# EAGLE board PCB (EAGLE 9.7.0)
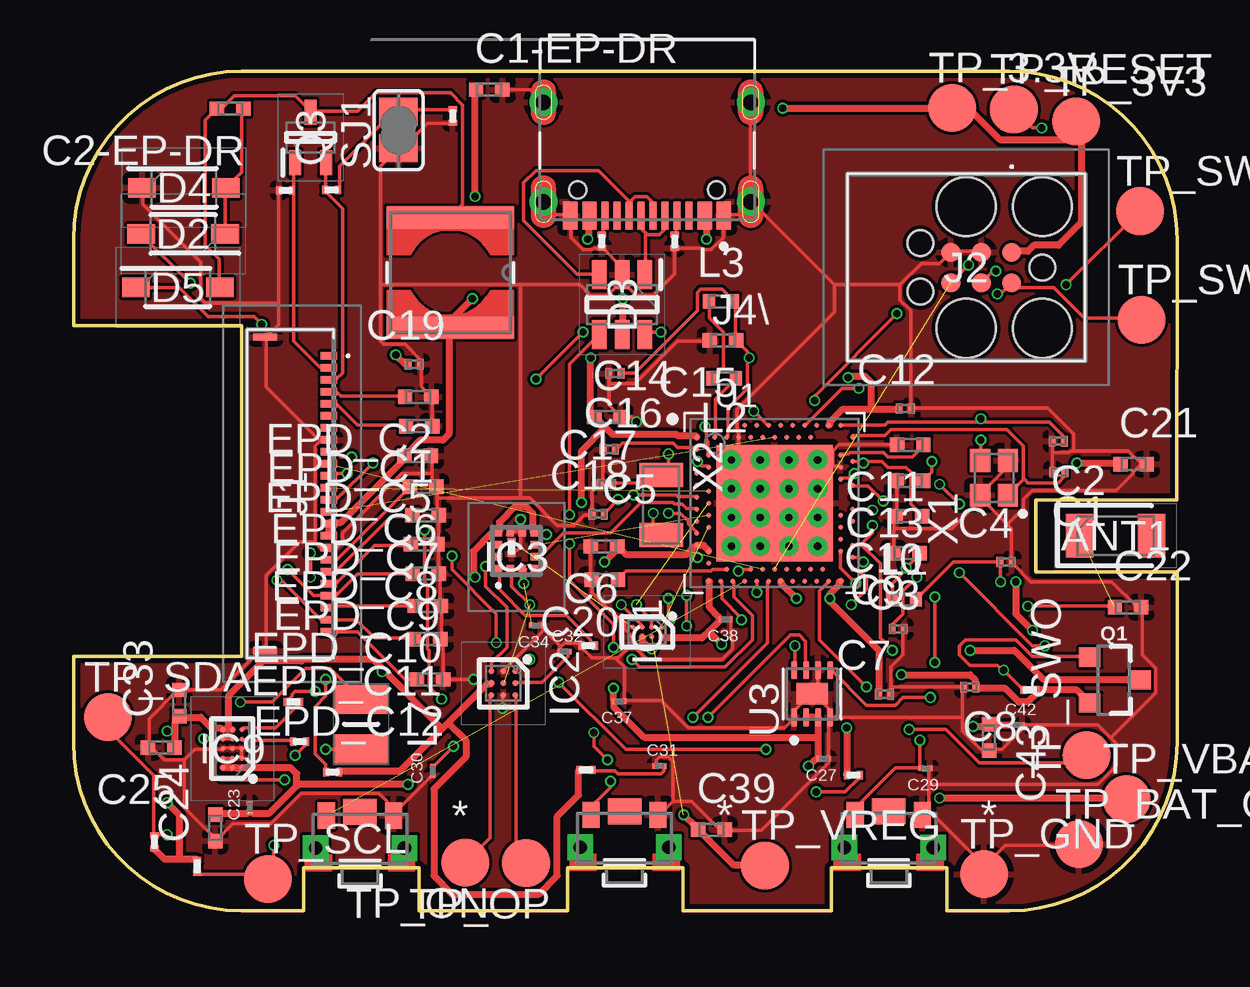
[diagram p0: board, top side]
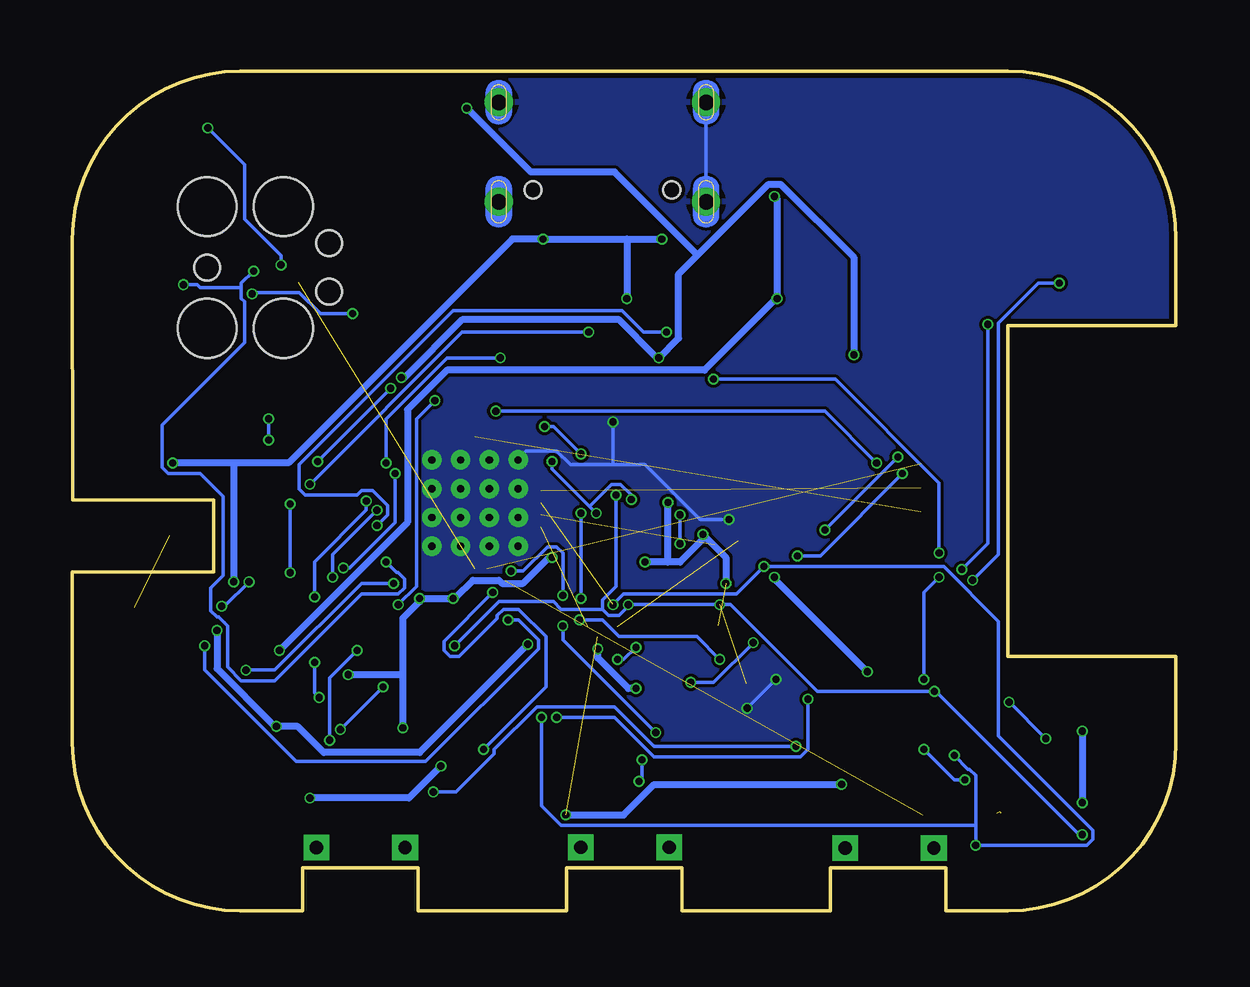
[diagram p1: board, bottom side, seen from below]

Size 46 x 35 mm. Coordinates in mm from the lower left corner, seen from the top.
Outline: 39,0 36.4,0 36.4,1.8 31.6,1.8 31.6,0 25.4,0 25.4,1.8 20.6,1.8 20.6,0 14.4,0 14.4,1.8 9.6,1.8 9.6,0 7,0 arc-90 0,7 0,10.6 7,10.6 7,24.4 0,24.4 0,28 arc-90 7,35 39,35 arc-90 46,28 45.99,17.13 40.11,17.13 40.12,14.13 46,14.13 46,7 arc-90 39,0
Copper layers (1*16): Top 0.035mm / dielectric 1.6mm / Bottom 0.035mm
Design rules "jlcpcb-2layers.dru": minimum track width 5mil, minimum drill 0.3mm, track to track 5mil, track to pad 5mil, pad to pad 5mil, via to via 5mil, smd to smd 5mil, copper to edge 0.2mm, drill to drill 6mil, minimum pad ring 10mil, minimum via ring 3mil, stop-mask expansion 4mil, vias tented up to drill 0mil, thermal gap 10mil
Net classes: 1 Power: width 0.3 mm; 2 Rest: width 0.15 mm

## Footprints (pad centres in the part's own frame; a part is rotated, then mirrored left to right if it is on the bottom)
2450AT18B100E_ANTC3216X140N = smd 1.15 x 1.8: 1 -1.5,0; 2 1.5,0
NORDIC_NRF_3_RESC0201_L = smd 0.28 x 0.43: 1 -0.255,0; 2 0.255,0
NORDIC_NRF_3_RESC0402_N = smd 0.6 x 0.6: 1 -0.55,0; 2 0.55,0
GRM011R60J152KE01L_2_CAPC0201X13N = smd 0.22 x 0.23: 1 -0.185,0; 2 0.185,0
ESP32_C6_LIBRARY_5_SOD3716X135N = smd 1.15 x 0.8: 1 -1.75,0; 2 1.75,0
ESP32_C6_LIBRARY_3_SOT95P280X145-6N = smd 1.2 x 0.6: 1 -1.25,0.95; 2 -1.25,0; 3 -1.25,-0.95; 4 1.25,-0.95; 5 1.25,0; 6 1.25,0.95
BQ25180YBGR_BGA8C40P2X4_100X155X50 = smd 0.2 x 0.2: A1 -0.2,0.6; A2 0.2,0.6; B1 -0.2,0.2; B2 0.2,0.2; C1 -0.2,-0.2; C2 0.2,-0.2; D1 -0.2,-0.6; D2 0.2,-0.6
DRV2605YZFR_BGA9C50P3X3_144X144X62 = smd 0.25 x 0.25: A1 -0.5,0.5; A2 0,0.5; A3 0.5,0.5; B1 -0.5,0; B2 0,0; B3 0.5,0; C1 -0.5,-0.5; C2 0,-0.5; C3 0.5,-0.5
BMA423_BMA423 = smd 0.3 x 0.35: 1 -0.75,-0.775; 2 -0.25,-0.775; 3 0.25,-0.775; 4 0.75,-0.775; 7 0.75,0.775; 8 0.25,0.775; 9 -0.25,0.775; 10 -0.75,0.775 | smd 0.35 x 0.3: 5 0.775,-0.25; 6 0.775,0.25; 11 -0.775,0.25; 12 -0.775,-0.25
RT6160AWSC_BGA15C40P3X5_140X230X60 = smd 0.216 x 0.216: A1 -0.4,0.8; A2 0,0.8; A3 0.4,0.8; B1 -0.4,0.4; B2 0,0.4; B3 0.4,0.4; C1 -0.4,0; C2 0,0; C3 0.4,0; D1 -0.4,-0.4; D2 0,-0.4; D3 0.4,-0.4; E1 -0.4,-0.8; E2 0,-0.8; E3 0.4,-0.8
503480-2400_5034802400 = smd 0.3 x 0.7: 1 -5.75,1.525; 2 -5.25,1.525; 3 -4.75,1.525; 4 -4.25,1.525; 5 -3.75,1.525; 6 -3.25,1.525; 7 -2.75,1.525; 8 -2.25,1.525; 9 -1.75,1.525; 10 -1.25,1.525; 11 -0.75,1.525; 12 -0.25,1.525; 13 0.25,1.525; 14 0.75,1.525; 15 1.25,1.525; 16 1.75,1.525; 17 2.25,1.525; 18 2.75,1.525; 19 3.25,1.525; 20 3.75,1.525; 21 4.25,1.525; 22 4.75,1.525; 23 5.25,1.525; 24 5.75,1.525 | smd 0.3 x 1: MP1 -6.54,-1.125; MP2 6.54,-1.125
TC2030-IDC_TC2030IDC = smd 0.783 x 0.783: 1 -0.953,-0.635; 2 -0.953,0.635; 3 0.317,-0.635; 4 0.317,0.635; 5 1.588,-0.635; 6 1.588,0.635 | hole 2.451: -2.223,-2.54; -2.223,2.54; 0.952,-2.54; 0.952,2.54 | hole 1.067: -2.223,0; 2.857,-1.016; 2.857,1.016
KH-TYPE-C-16P_KINGHELM_KH-TYPE-C-16P = smd 0.6 x 1.15: A1_B12 -3.2,4.725; A4_B9 -2.4,4.725; A9_B4 2.4,4.725; A12_B1 3.2,4.725 | smd 0.3 x 1.15: A5 -1.25,4.725; A6 -0.25,4.725; A7 0.25,4.725; A8 1.25,4.725; B5 1.75,4.725; B6 0.75,4.725; B7 -0.75,4.725; B8 -1.75,4.725 | drill 0.65 pad 1.05: SH1 -4.32,0; SH2 4.32,0; SH3 -4.32,4.15; SH4 4.32,4.15 | hole 0.7: -2.89,3.65; 2.89,3.65
NORDIC_NRF_2_RESC0402_L = smd 0.5 x 0.6: 1 -0.5,0; 2 0.5,0
ESP32_C6_LIBRARY_2_IND_4828-WE-TPC_WRE = smd 0.9 x 5.3: 1 -2.286,0; 2 2.286,0
MLP2016SR47MT0S1_INDC2016X100N = smd 1.2 x 2.2: 1 -1.028,0; 2 1.028,0
ESP32_C6_LIBRARY_4_ESP32_C6_LIBRARY_4_ESP32_C6_LIBRARY_4_ESP32_C6_LIBRARY_4_ESP32_WROVER_SPARKFUN-DISCRETESEMI_SOT23-3 = smd 0.8 x 0.9: 1 -0.95,-1; 2 0.95,-1; 3 0,1.1
ESP32_C6_LIBRARY_6_SOT65P210X110-3N = smd 1.05 x 0.5: 1 -1.05,0.65; 2 -1.05,-0.65; 3 1.05,0
CPF0201D7K68C1_0201 = smd 0.35 x 0.25: 1 0,0.275; 2 0,-0.275
ESP32_C6_LIBRARY_7_JUMPER_SJ = smd 1.168 x 1.6: 1 -0.762,0; 2 0.762,0
2025-10-22_07-23-44_LIBRARY_SW_EVP-AKE31A_PAN = smd 0.711 x 1.092: 1 -1.4,-0.972; 2 1.4,-0.972 | drill 0.559 pad 0.914 square: 3 -1.848,0.381; 4 1.848,0.381 | smd 1.397 x 1.092: 5 0,-1.124
HECTOR_WATCH_1_TP20R = smd 2 x 2: TP 0,0
NORDIC_NRF_4_AQFN50P700X700X85_HS-74N = smd 4.85 x 4.85: P$74 0,0 | drill 0.3 pad 0.6: P$75 -1.8,1.8; P$76 -0.6,1.8; P$77 0.6,1.8; P$78 1.8,1.8; P$79 -1.8,0.6; P$80 -0.6,0.6; P$81 0.6,0.6; P$82 1.8,0.6; P$83 -1.8,-0.6; P$84 -0.6,-0.6; P$85 0.6,-0.6; P$86 1.8,-0.6; P$87 -1.8,-1.8; P$88 -0.6,-1.8; P$89 0.6,-1.8; P$90 1.8,-1.8 | smd 0.2 x 0.2: P$A8 -1.25,3.25; P$A10 -0.75,3.25; P$A12 -0.25,3.25; P$A14 0.25,3.25; P$A16 0.75,3.25; P$A18 1.25,3.25; P$A20 1.75,3.25; P$A22 2.25,3.25; P$A23 2.75,3.25; P$AA24 3.25,-2.25; P$AB2 -2.75,-2.5; P$AC5 -2,-2.75; P$AC9 -1,-2.75; P$AC11 -0.5,-2.75; P$AC13 0,-2.75; P$AC15 0.5,-2.75; P$AC17 1,-2.75; P$AC19 1.5,-2.75; P$AC21 2,-2.75; P$AC24 3.25,-2.75; P$AD2 -2.75,-3.25; P$AD4 -2.25,-3.25; P$AD6 -1.75,-3.25; P$AD8 -1.25,-3.25; P$AD10 -0.75,-3.25; P$AD12 -0.25,-3.25; P$AD14 0.25,-3.25; P$AD16 0.75,-3.25; P$AD18 1.25,-3.25; P$AD20 1.75,-3.25; P$AD22 2.25,-3.25; P$AD23 2.75,-3.25; P$B1 -3.25,2.75; P$B3 -2.5,2.75; P$B5 -2,2.75; P$B7 -1.5,2.75; P$B9 -1,2.75; P$B11 -0.5,2.75; P$B13 0,2.75; P$B15 0.5,2.75; P$B17 1,2.75; P$B19 1.5,2.75; P$B24 3.25,2.75; P$C1 -3.25,2.25; P$D2 -2.75,2; P$D23 2.75,2; P$E24 3.25,1.75; P$F2 -2.75,1.5; P$F23 2.75,1.5; P$G1 -3.25,1.25; P$H2 -2.75,1; P$H23 2.75,1; P$J1 -3.25,0.75; P$J24 3.25,0.75; P$K2 -2.75,0.5; P$L1 -3.25,0.25; P$L24 3.25,0.25; P$M2 -2.75,0; P$N1 -3.25,-0.25; P$N24 3.25,-0.25; P$P2 -2.75,-0.5; P$P23 2.75,-0.5; P$R1 -3.25,-0.75; P$R24 3.25,-0.75; P$T2 -2.75,-1; P$T23 2.75,-1; P$U1 -3.25,-1.25; P$U24 3.25,-1.25; P$V23 2.75,-1.5; P$W1 -3.25,-1.75; P$W24 3.25,-1.75; P$Y2 -2.75,-2; P$Y23 2.75,-2
ESP32_C6_LIBRARY_SON50P200X200X80-9N = smd 0.76 x 0.27: 1 -0.985,0.75; 2 -0.985,0.25; 3 -0.985,-0.25; 4 -0.985,-0.75; 5 0.985,-0.75; 6 0.985,-0.25; 7 0.985,0.25; 8 0.985,0.75 | smd 0.9 x 1.3: 9 0,0
NORDIC_NRF_BT-XTAL_2016_N = smd 0.95 x 0.85: 1 -0.725,-0.575; 2 0.725,-0.575; 3 0.725,0.575; 4 -0.725,0.575
NORDIC_NRF_1_XTAL_3215_N = smd 1 x 1.8: 1 -1.25,0; 2 1.25,0

## Placement (x,y rotation side)
ANT1  2450AT18B100E  [2450AT18B100E_ANTC3216X140N]  43.44,15.64 0 top
C1  12pF  [NORDIC_NRF_3_RESC0201_L]  41.07,18.29 180 top
C1-EP-DR  10μF  [NORDIC_NRF_3_RESC0402_N]  17.33,34.23 0 top
C2  12pF  [NORDIC_NRF_3_RESC0201_L]  41.04,19.58 180 top
C2-EP-DR  4.7μF/25V  [NORDIC_NRF_3_RESC0402_N]  6.53,33.44 180 top
C3  1pF  [NORDIC_NRF_3_RESC0402_N]  34.72,14.91 180 top
C4  1pF  [NORDIC_NRF_3_RESC0201_L]  38.87,14.54 0 top
C5  100nF  [NORDIC_NRF_3_RESC0201_L]  22.33,19.24 180 top
C6  4.7μF  [NORDIC_NRF_3_RESC0402_N]  22.12,15.19 180 top
C7  100nF  [NORDIC_NRF_3_RESC0201_L]  33.81,9.03 0 top
C8  100nF  [NORDIC_NRF_3_RESC0201_L]  37.36,9.33 180 top
C9  820pF  [NORDIC_NRF_3_RESC0201_L]  34.37,11.75 0 top
C10  N.C.  [NORDIC_NRF_3_RESC0402_N]  34.83,16.46 180 top
C11  100pF  [NORDIC_NRF_3_RESC0402_N]  34.88,19.43 180 top
C12  100nF  [NORDIC_NRF_3_RESC0201_L]  34.67,20.94 0 top
C13  N.C.  [NORDIC_NRF_3_RESC0402_N]  34.87,17.92 180 top
C14  4.7μF  [NORDIC_NRF_3_RESC0402_N]  22.25,20.58 0 top
C15  1.0μF  [NORDIC_NRF_3_RESC0402_N]  27.07,23.78 180 top
C16  47nF  [NORDIC_NRF_3_RESC0201_L]  22.57,22.4 180 top
C17  12pF  [NORDIC_NRF_3_RESC0201_L]  22.22,17.79 0 top
C18  12pF  [NORDIC_NRF_3_RESC0201_L]  21.87,16.54 0 top
C19  100nF  [NORDIC_NRF_3_RESC0201_L]  14.21,22.79 0 top
C20  4.7μF  [NORDIC_NRF_3_RESC0402_N]  22.15,13.79 180 top
C21  4.7μF  [NORDIC_NRF_3_RESC0402_N]  44.19,18.62 0 top
C22  N.C.  [NORDIC_NRF_3_RESC0402_N]  43.96,12.65 0 top
C23  0.1μF  [GRM011R60J152KE01L_2_CAPC0201X13N]  7.34,4.31 90 top
C24  10μF  [NORDIC_NRF_3_RESC0402_N]  5.91,3.46 90 top
C25  22μF  [NORDIC_NRF_3_RESC0402_N]  3.66,6.81 180 top
C27  0.1μF  [GRM011R60J152KE01L_2_CAPC0201X13N]  31.27,6.34 180 top
C29  1μF  [GRM011R60J152KE01L_2_CAPC0201X13N]  35.51,5.94 180 top
C30  1μF  [GRM011R60J152KE01L_2_CAPC0201X13N]  14.97,5.84 90 top
C31  1μF  [GRM011R60J152KE01L_2_CAPC0201X13N]  24.43,6.04 0 top
C32  1μF  [GRM011R60J152KE01L_2_CAPC0201X13N]  20.47,10.8 0 top
C33  22μF  [NORDIC_NRF_3_RESC0402_N]  4.41,8.66 90 top
C34  0.1μF  [GRM011R60J152KE01L_2_CAPC0201X13N]  19.28,11.9 180 top
C37  1μF  [GRM011R60J152KE01L_2_CAPC0201X13N]  22.75,8.74 180 top
C38  1μF  [GRM011R60J152KE01L_2_CAPC0201X13N]  27.18,12.15 180 top
C39  10μF  [NORDIC_NRF_3_RESC0402_N]  26.59,3.38 0 top
C42  0.1μF  [GRM011R60J152KE01L_2_CAPC0201X13N]  39.37,7.74 0 top
C43  4.7μF  [NORDIC_NRF_3_RESC0402_N]  38.16,7.23 270 top
D2  MBR0530  [ESP32_C6_LIBRARY_5_SOD3716X135N]  4.57,28.22 180 top
D3  USBLC6-2SC6Y  [ESP32_C6_LIBRARY_3_SOT95P280X145-6N]  22.87,25.27 270 top
D4  MBR0530  [ESP32_C6_LIBRARY_5_SOD3716X135N]  4.61,30.14 0 top
D5  MBR0530  [ESP32_C6_LIBRARY_5_SOD3716X135N]  4.35,25.99 0 top
EPD_C1  1μF/50V  [NORDIC_NRF_3_RESC0402_N]  14.41,20.2 180 top
EPD_C2  1μF/50V  [NORDIC_NRF_3_RESC0402_N]  14.37,21.42 180 top
EPD_C5  0.1μF/50V  [NORDIC_NRF_3_RESC0402_N]  14.34,18.97 180 top
EPD_C6  1μF/50V  [NORDIC_NRF_3_RESC0402_N]  14.58,17.67 180 top
EPD_C7  1μF/50V  [NORDIC_NRF_3_RESC0402_N]  14.67,16.48 180 top
EPD_C8  1μF/50V  [NORDIC_NRF_3_RESC0402_N]  14.61,15.28 180 top
EPD_C9  1μF/50V  [NORDIC_NRF_3_RESC0402_N]  14.68,14.06 180 top
EPD_C10  1μF/50V  [NORDIC_NRF_3_RESC0402_N]  14.77,12.71 180 top
EPD_C11  1μF/50V  [NORDIC_NRF_3_RESC0402_N]  14.75,11.33 180 top
EPD_C12  1μF/50V  [NORDIC_NRF_3_RESC0402_N]  14.86,9.65 180 top
IC1  BQ25180YBGR  [BQ25180YBGR_BGA8C40P2X4_100X155X50]  23.91,11.62 270 top
IC2  DRV2605YZFR  [DRV2605YZFR_BGA9C50P3X3_144X144X62]  17.92,9.48 270 top
IC3  BMA421  [BMA423_BMA423]  18.46,15.01 0 top
IC9  RT6160AWSC  [RT6160AWSC_BGA15C40P3X5_140X230X60]  6.62,6.76 180 top
J1  503480-2400  [503480-2400_5034802400]  9.12,17.38 270 top
J2  TC2030-IDC  [TC2030-IDC_TC2030IDC]  38.16,26.82 180 top
J4\  KH-TYPE-C-16P  [KH-TYPE-C-16P_KINGHELM_KH-TYPE-C-16P]  23.91,33.71 180 top
L1  3.9nH  [NORDIC_NRF_2_RESC0402_L]  34.62,12.99 0 top
L2  10μH  [NORDIC_NRF_2_RESC0402_L]  27.12,22.2 180 top
L3  15nH  [NORDIC_NRF_2_RESC0402_L]  27,25.41 0 top
L5  68μH  [ESP32_C6_LIBRARY_2_IND_4828-WE-TPC_WRE]  15.71,26.61 270 top
L7  FTC252012SR47MBCA  [MLP2016SR47MT0S1_INDC2016X100N]  11.99,7.78 90 top
Q1  20V/4.2A/52mΩ/1.4W  [ESP32_C6_LIBRARY_4_ESP32_C6_LIBRARY_4_ESP32_C6_LIBRARY_4_ESP32_C6_LIBRARY_4_ESP32_WROVER_SPARKFUN-DISCRETESEMI_SOT23-3]  43.36,9.62 270 top
Q3  SI1308EDL-T1-GE3  [ESP32_C6_LIBRARY_6_SOT65P210X110-3N]  9.88,32.24 90 top
R1_EP_DR  0.47  [CPF0201D7K68C1_0201]  10.76,30.05 270 top
R1_USB  5K1  [CPF0201D7K68C1_0201]  25.06,27.91 180 top
R2  0  [CPF0201D7K68C1_0201]  9.17,8.71 90 top
R2_EP_DR  10K  [CPF0201D7K68C1_0201]  8.84,30.03 90 top
R2_USB  5K1  [CPF0201D7K68C1_0201]  22.02,27.92 0 top
R3  0  [CPF0201D7K68C1_0201]  21.46,11.05 90 top
R4  0  [CPF0201D7K68C1_0201]  9.42,7.05 270 top
R5  10K  [CPF0201D7K68C1_0201]  32.51,5.65 270 top
R7  10K  [CPF0201D7K68C1_0201]  10.8,5.79 90 top
R8  10K  [CPF0201D7K68C1_0201]  21.36,5.88 270 top
R9  10K  [CPF0201D7K68C1_0201]  18.26,15.15 180 top
R17  3K3  [CPF0201D7K68C1_0201]  5.15,1.85 0 top
R18  3K3  [CPF0201D7K68C1_0201]  3.38,2.87 180 top
R_PWR_EPD  10K  [CPF0201D7K68C1_0201]  39.87,9.21 90 top
R_TYPE_SEL  2.2  [CPF0201D7K68C1_0201]  15.81,33.14 180 top
SJ1  [ESP32_C6_LIBRARY_7_JUMPER_SJ]  13.55,32.55 90 top
SW_DN  2025-10-22_07-23-44_LIBRARY_EVP-AKE31ASW_EVP-AKE31A_PAN  [2025-10-22_07-23-44_LIBRARY_SW_EVP-AKE31A_PAN]  33.98,3.02 180 top
SW_ENT  2025-10-22_07-23-44_LIBRARY_EVP-AKE31ASW_EVP-AKE31A_PAN  [2025-10-22_07-23-44_LIBRARY_SW_EVP-AKE31A_PAN]  22.97,3.03 180 top
SW_UP  2025-10-22_07-23-44_LIBRARY_EVP-AKE31ASW_EVP-AKE31A_PAN  [2025-10-22_07-23-44_LIBRARY_SW_EVP-AKE31A_PAN]  11.94,3 180 top
TP_3.3V  HECTOR_WATCH_1_TPTP20R  [HECTOR_WATCH_1_TP20R]  36.63,33.47 0 top
TP_3V3  HECTOR_WATCH_1_TPTP20R  [HECTOR_WATCH_1_TP20R]  41.8,32.91 0 top
TP_BAT_GND  HECTOR_WATCH_1_TPTP20R  [HECTOR_WATCH_1_TP20R]  41.91,2.78 0 top
TP_GND  HECTOR_WATCH_1_TPTP20R  [HECTOR_WATCH_1_TP20R]  37.95,1.53 0 top
TP_ON  HECTOR_WATCH_1_TPTP20R  [HECTOR_WATCH_1_TP20R]  16.33,2.01 180 top
TP_OP  HECTOR_WATCH_1_TPTP20R  [HECTOR_WATCH_1_TP20R]  18.86,1.98 180 top
TP_RESET  HECTOR_WATCH_1_TPTP20R  [HECTOR_WATCH_1_TP20R]  39.2,33.41 0 top
TP_SCL  HECTOR_WATCH_1_TPTP20R  [HECTOR_WATCH_1_TP20R]  8.11,1.33 0 top
TP_SDA  HECTOR_WATCH_1_TPTP20R  [HECTOR_WATCH_1_TP20R]  1.44,8.07 0 top
TP_SWDCLK  HECTOR_WATCH_1_TPTP20R  [HECTOR_WATCH_1_TP20R]  44.46,29.17 0 top
TP_SWDIO  HECTOR_WATCH_1_TPTP20R  [HECTOR_WATCH_1_TP20R]  44.52,24.64 0 top
TP_SWO  HECTOR_WATCH_1_TPTP20R  [HECTOR_WATCH_1_TP20R]  42.22,6.49 90 top
TP_VBAT  HECTOR_WATCH_1_TPTP20R  [HECTOR_WATCH_1_TP20R]  43.89,4.66 0 top
TP_VREG  HECTOR_WATCH_1_TPTP20R  [HECTOR_WATCH_1_TP20R]  28.82,1.89 0 top
U1  NRF52840_QF  [NORDIC_NRF_4_AQFN50P700X700X85_HS-74N]  29.22,17 0 top
U3  MAX17048G+T10  [ESP32_C6_LIBRARY_SON50P200X200X80-9N]  30.79,9.05 90 top
X1  32MHz  [NORDIC_NRF_BT-XTAL_2016_N]  38.37,18.05 90 top
X2  32.768kHz  [NORDIC_NRF_1_XTAL_3215_N]  24.5,16.91 270 top

## Library data of the parts
ANT1 = InkTime_v5; ARROW_PART_NUMBER: 2450AT18B100E; ARROW_PRICE-STOCK: https://www.arrow.com/en/products/2450at18b100e/johanson-dielectrics?utm_currency=USD&region=nac; DESCRIPTION: Antennas 2.45GHz ANTENNA; HEIGHT: 1.4mm; MANUFACTURER_NAME: JOHANSON TECHNOLOGY; MANUFACTURER_PART_NUMBER: 2450AT18B100E; MOUSER_PART_NUMBER: 609-2450AT18B100E; MOUSER_PRICE-STOCK: https://www.mouser.co.uk/ProductDetail/Johanson-Technology/2450AT18B100E?qs=yCnrNFeXz%252Bh5MFsFIXGZGA%3D%3D
C1 C1-EP-DR C2 C2-EP-DR C3-C22 C24 C25 C33 C39 C43 EPD_C1 EPD_C2 EPD_C5-EPD_C12 L1-L3 R1_EP_DR R1_USB R2 R2_EP_DR R2_USB R3-R5 R7-R9 R17 R18 R_PWR_EPD R_TYPE_SEL SJ1 TP_3.3V TP_3V3 TP_BAT_GND TP_GND TP_ON TP_OP TP_RESET TP_SCL TP_SDA TP_SWDCLK TP_SWDIO TP_SWO TP_VBAT TP_VREG U1 X1 X2 = InkTime_v5
C23 C27 C29-C32 C34 C37 C38 C42 = InkTime_v5; AVAILABILITY: In Stock; CHECK_PRICES: https://www.snapeda.com/parts/GRM011R60J152KE01L/Murata/view-part/?ref=eda; DESCRIPTION: SMD Capacitor X5R(EIA) with Capacitance: 1500pF Tol. 10%. Rated Voltage: 6.3Vdc; MF: Murata; MP: GRM011R60J152KE01L; PACKAGE: 0201 Murata; PRICE: None; SNAPEDA_LINK: https://www.snapeda.com/parts/GRM011R60J152KE01L/Murata/view-part/?ref=snap
D2 D4 D5 = InkTime_v5; AVAILABILITY: In Stock; CHECK_PRICES: https://www.snapeda.com/parts/MBR0530/Onsemi/view-part/?ref=eda; DESCRIPTION: Diode Schottky 30 V 500mA Surface Mount SOD-123; MF: ON Semiconductor; MP: MBR0530; PACKAGE: SOD-123-2 ON Semiconductor; PRICE: None; PURCHASE-URL: https://www.snapeda.com/api/url_track_click_mouser/?unipart_id=179458&manufacturer=ON Semiconductor&part_name=MBR0530&search_term=None; SNAPEDA_LINK: https://www.snapeda.com/parts/MBR0530/Onsemi/view-part/?ref=snap
D3 = InkTime_v5; AVAILABILITY: In Stock; CHECK_PRICES: https://www.snapeda.com/parts/USBLC6-2SC6Y/STMicroelectronics/view-part/?ref=eda; DESCRIPTION: 17V Clamp 5A (8/20µs) Ipp Tvs Diode Surface Mount SOT-23-6; MF: STMicroelectronics; MP: USBLC6-2SC6Y; PACKAGE: SOT-23-6 STMicroelectronics; PRICE: None; SNAPEDA_LINK: https://www.snapeda.com/parts/USBLC6-2SC6Y/STMicroelectronics/view-part/?ref=snap
IC1 = InkTime_v5; ARROW_PART_NUMBER: BQ25180YBGR; ARROW_PRICE-STOCK: https://www.arrow.com/en/products/bq25180ybgr/texas-instruments?utm_currency=USD&region=nac; DESCRIPTION: Charger IC Lithium Ion/Polymer, Lithium Iron Phosphate 8-DSBGA (1.6x1.1); HEIGHT: 0.5mm; MANUFACTURER_NAME: Texas Instruments; MANUFACTURER_PART_NUMBER: BQ25180YBGR; MOUSER_PART_NUMBER: 595-BQ25180YBGR; MOUSER_PRICE-STOCK: https://www.mouser.co.uk/ProductDetail/Texas-Instruments/BQ25180YBGR?qs=doiCPypUmgEWjAK%252BJAX6Tw%3D%3D
IC2 = InkTime_v5; ARROW_PART_NUMBER: DRV2605YZFR; ARROW_PRICE-STOCK: https://www.arrow.com/en/products/drv2605yzfr/texas-instruments?region=nac; DESCRIPTION: Haptic Driver for ERM/LRA with Built-In Library and Smart Loop Architecture; HEIGHT: 0.625mm; MANUFACTURER_NAME: Texas Instruments; MANUFACTURER_PART_NUMBER: DRV2605YZFR
IC3 = InkTime_v5; ARROW_PART_NUMBER: BMA423; ARROW_PRICE-STOCK: https://www.arrow.com/en/products/bma423/bosch; DESCRIPTION: Accelerometers Triaxial low-g 12bit Acceleration Sensor; HEIGHT: 1mm; MANUFACTURER_NAME: BOSCH; MANUFACTURER_PART_NUMBER: BMA423; MOUSER_PART_NUMBER: 262-BMA423; MOUSER_PRICE-STOCK: https://www.mouser.co.uk/ProductDetail/Bosch-Sensortec/BMA423?qs=HXFqYaX1Q2xC%252BSgeGoX3mg%3D%3D
IC9 = InkTime_v5; DESCRIPTION: Buck-Boost Regulator Positive Output Step-Up/Step-Down I2C DC-DC Controller IC 15-WL-CSP (BSC) (1.4x2.3); HEIGHT: 0.6mm; MANUFACTURER_NAME: RICHTEK; MANUFACTURER_PART_NUMBER: RT6160AWSC; MOUSER_PART_NUMBER: 835-RT6160AWSC; MOUSER_PRICE-STOCK: https://www.mouser.co.uk/ProductDetail/Richtek/RT6160AWSC?qs=amGC7iS6iy%2FLd9PSoixZXQ%3D%3D
J1 = InkTime_v5; DESCRIPTION: FFC & FPC Connectors 0.5mm FPC RA SMT Dual Contact 24Ckt; HEIGHT: 1.87mm; MANUFACTURER_NAME: Molex; MANUFACTURER_PART_NUMBER: 503480-2400; MOUSER_PART_NUMBER: 538-503480-2400; MOUSER_PRICE-STOCK: https://www.mouser.co.uk/ProductDetail/Molex/503480-2400?qs=OAhjpuo3Vu7efIoxFh9AOw%3D%3D
J2 = InkTime_v5; DESCRIPTION: CABLE ADAPTER 6 POS; HEIGHT: 19mm; MANUFACTURER_NAME: Tag Connect; MANUFACTURER_PART_NUMBER: TC2030-IDC
J4\ = InkTime_v5; AVAILABILITY: Not in stock; CHECK_PRICES: https://www.snapeda.com/parts/KH-TYPE-C-16P/Kinghelm/view-part/?ref=eda; MF: kinghelm; MP: KH-TYPE-C-16P; PACKAGE: None; PRICE: None; SNAPEDA_LINK: https://www.snapeda.com/parts/KH-TYPE-C-16P/Kinghelm/view-part/?ref=snap
L5 = InkTime_v5; COPYRIGHT: Copyright (C) 2024 Ultra Librarian. All rights reserved.; MANUFACTURER_PART_NUMBER: 744043680; MFR_NAME: Wurth Electronics
L7 = InkTime_v5; DESCRIPTION: SMD / SMT Inductors (Coils), L=0.47?H, L x W x T :; HEIGHT: 1mm; JLCPCB: https://jlcpcb.com/partdetail/6763488-FTC252012SR47MBCA/C5832368; MANUFACTURER_NAME: TDK; MANUFACTURER_PART_NUMBER: FTC252012SR47MBCA
Q1 = InkTime_v5; PROD_ID: TRAN-14388
Q3 = InkTime_v5; AVAILABILITY: In Stock; CHECK_PRICES: https://www.snapeda.com/parts/SI1308EDL-T1-GE3/Vishay+Siliconix/view-part/?ref=eda; DESCRIPTION: Si1308EDL-T1-GE3 N-channel MOSFET Transistor, 1.5 A, 30 V, 3-Pin SC-70 | Siliconix / Vishay SI1308EDL-T1-GE3; MF: Vishay Siliconix; MP: SI1308EDL-T1-GE3; PACKAGE: SOT-323 Vishay Semiconductor; PRICE: None; PURCHASE-URL: https://www.snapeda.com/api/url_track_click_mouser/?unipart_id=274603&manufacturer=Vishay Siliconix&part_name=SI1308EDL-T1-GE3&search_term=None; SNAPEDA_LINK: https://www.snapeda.com/parts/SI1308EDL-T1-GE3/Vishay+Siliconix/view-part/?ref=snap
SW_DN SW_ENT SW_UP = InkTime_v5; COPYRIGHT: Copyright (C) 2025 Ultra Librarian. All rights reserved.; DIGI-KEY_PART_NUMBER_1: P123437TR-ND; DIGI-KEY_PART_NUMBER_2: P123437CT-ND; DIGI-KEY_PART_NUMBER_3: P123437DKR-ND; MANUFACTURER_NAME: Panasonic; MANUFACTURER_PART_NUMBER: EVP-AKE31A
U3 = InkTime_v5; AVAILABILITY: In Stock; CHECK_PRICES: https://www.snapeda.com/parts/MAX17048G+T10/Analog+Devices/view-part/?ref=eda; DESCRIPTION: 3µA 1-Cell/2-Cell Fuel Gauge with ModelGauge; MF: Analog Devices; MP: MAX17048G+T10; PACKAGE: TDFN-8 Maxim; PRICE: None; PURCHASE-URL: https://www.snapeda.com/api/url_track_click_mouser/?unipart_id=329239&manufacturer=Analog Devices&part_name=MAX17048G+T10&search_term=None; SNAPEDA_LINK: https://www.snapeda.com/parts/MAX17048G+T10/Analog+Devices/view-part/?ref=snap

## Nets
3V3 [Power]: C6.1 C7.1 C8.1 C12.1 C14.1 C19.1 C25.1 C33.1 C34.2 IC2.C2 IC3.3 IC3.7 IC3.10 IC9.E2 IC9.E3 J2.1 Q1.2 R5.2 R7.2 R8.2 R17.1 R18.1 R_PWR_EPD.2 TP_3.3V.TP TP_3V3.TP U1.P$A22 U1.P$AD14 U1.P$AD23 U1.P$B1 U1.P$W1 U1.P$Y2
ALERT [Rest]: U1.P$J24 U3.5
D+ [Rest]: D3.4 U1.P$AD6
D- [Rest]: D3.6 U1.P$AD4
DEC1 [Rest]: C5.1 U1.P$C1
DEC3 [Rest]: C11.1 U1.P$D23
DEC4_6 [Rest]: C10.1 C15.1 C16.1 L3.2 U1.P$B5 U1.P$E24
DN [Rest]: D3.1 J4\.A7 J4\.B7
DP [Rest]: D3.3 J4\.A6 J4\.B6
EPD_3V3 [Power]: C1-EP-DR.1 EPD_C5.2 J1.15 J1.16 L5.2 Q1.3
EPD_BUSY [Rest]: J1.9 U1.P$AD12
EPD_CS [Rest]: J1.12 U1.P$K2
EPD_DC [Rest]: J1.11 U1.P$AD10
EPD_RST [Rest]: J1.10 U1.P$AC11
GDR [Rest]: J1.2 Q3.1 R2_EP_DR.2
GND [Rest]: C1-EP-DR.2 C1.2 C2.2 C3.2 C4.2 C5.2 C6.2 C7.2 C8.2 C9.2 C10.2 C11.2 C12.2 C13.2 C14.2 C15.2 C16.2 C17.1 C18.1 C19.2 C20.2 C21.2 C22.2 C23.2 C24.1 C25.2 C27.1 C29.1 C30.1 C31.1 C32.1 C33.2 C34.1 C37.1 C38.1 C39.2 C42.2 C43.2 D3.2 D4.1 EPD_C1.1 EPD_C2.1 EPD_C5.1 EPD_C6.1 EPD_C7.1 EPD_C8.1 EPD_C9.1 EPD_C10.1 EPD_C11.1 EPD_C12.1 IC1.D2 IC2.B1 IC2.B3 IC3.8 IC3.9 IC9.B1 IC9.C1 IC9.C2 IC9.C3 J1.8 J1.17 J1.MP1 J1.MP2 J2.3 J2.5 J4\.A1_B12 J4\.A12_B1 J4\.SH1 J4\.SH2 J4\.SH3 J4\.SH4 R1_USB.1 R2_EP_DR.1 R2_USB.2 R3.1 R9.1 R_TYPE_SEL.1 SJ1.1 SW_DN.1 SW_ENT.1 SW_UP.1 TP_BAT_GND.TP TP_GND.TP U1.P$74 U1.P$75 U1.P$76 U1.P$77 U1.P$78 U1.P$79 U1.P$80 U1.P$81 U1.P$82 U1.P$83 U1.P$84 U1.P$85 U1.P$86 U1.P$87 U1.P$88 U1.P$89 U1.P$90 U1.P$B7 U1.P$F23 U3.1 U3.4 U3.6 U3.9 X1.2 X1.4
HAPTIC_EN [Rest]: IC2.A1 U1.P$U1
IMU_INT1 [Rest]: IC3.5 U1.P$N1
IMU_INT2 [Rest]: IC3.6 U1.P$P2
LX1 [Rest]: IC9.B2 IC9.B3 L7.1
LX2 [Rest]: IC9.D2 IC9.D3 L7.2
MOSI [Rest]: J1.14 U1.P$B13
N$1 [Rest]: IC9.D1 R4.2
N$2 [Rest]: J4\.A5 R1_USB.2
N$3 [Rest]: C20.1 U1.P$AC5
N$4 [Rest]: IC9.E1 R2.2
N$5 [Rest]: EPD_C2.2 J1.4
N$6 [Rest]: L2.1 U1.P$B3
N$7 [Rest]: IC1.D1 R9.2
N$8 [Rest]: IC3.1 R3.2
N$9 [Rest]: EPD_C1.2 J1.5
N$10 [Rest]: J4\.B5 R2_USB.1
N$12 [Rest]: C31.2 R8.1
N$13 [Rest]: C2-EP-DR.1 D2.1 D4.2
N$14 [Rest]: C30.2 R5.1
N$15 [Rest]: C2-EP-DR.2 D5.2 L5.1 Q3.3
N$16 [Rest]: EPD_C6.2 J1.18
N$17 [Rest]: C32.2 IC2.A2
N$18 [Rest]: EPD_C7.2 J1.19
N$19 [Rest]: EPD_C8.2 J1.20
N$20 [Rest]: L2.2 L3.1
N$21 [Rest]: EPD_C10.2 J1.22
N$23 [Rest]: EPD_C12.2 J1.24
N$24 [Rest]: C13.1 U1.P$A18
N$25 [Rest]: R1_EP_DR.1 R_TYPE_SEL.2 SJ1.2
N$26 [Rest]: C9.1 U1.P$N24
N$27 [Rest]: C3.1 L1.1 U1.P$H23
N$28 [Rest]: C2.1 U1.P$A23 X1.3
N$29 [Rest]: C1.1 U1.P$B24 X1.1
OUT+ [Rest]: IC2.A3 TP_OP.TP
OUT- [Rest]: IC2.C3 TP_ON.TP
P0.00/XL1 [Rest]: C17.2 U1.P$D2 X2.1
P0.01/XL2 [Rest]: C18.2 U1.P$F2 X2.2
P0.04 [Rest]: U1.P$J1
P0.09 [Rest]: U1.P$L24
P0.13 [Rest]: SW_UP.2 U1.P$AD8
P0.14 [Rest]: SW_ENT.2 U1.P$AC9
P0.19 [Rest]: U1.P$AC15
P0.20 [Rest]: U1.P$AD16
P0.21 [Rest]: U1.P$AC17
P0.22 [Rest]: U1.P$AD18
P0.23 [Rest]: U1.P$AC19
P0.24 [Rest]: U1.P$AD20
P0.25 [Rest]: U1.P$AC21
P0.28 [Rest]: U1.P$B11
P0.29 [Rest]: U1.P$A10
P0.30 [Rest]: U1.P$B9
P0.31 [Rest]: U1.P$A8
P1.01 [Rest]: Q1.1 R_PWR_EPD.1 U1.P$Y23
P1.02 [Rest]: C29.2 R7.1 SW_DN.2 U1.P$W24
P1.03 [Rest]: U1.P$V23
P1.04 [Rest]: U1.P$U24
P1.05 [Rest]: U1.P$T23
P1.06 [Rest]: U1.P$R24
P1.07 [Rest]: U1.P$P23
P1.09 [Rest]: U1.P$R1
P1.10 [Rest]: U1.P$A20
P1.11 [Rest]: U1.P$B19
P1.12 [Rest]: U1.P$B17
P1.13 [Rest]: U1.P$A16
P1.14 [Rest]: U1.P$B15
P1.15 [Rest]: U1.P$A14
PMIC_INT [Rest]: IC1.A1 U1.P$T2
PO.26 [Rest]: U1.P$G1
PO.27 [Rest]: U1.P$H2
PREVGH [Rest]: D5.1 EPD_C9.2 J1.21
PREVGL [Rest]: D2.2 EPD_C11.2 J1.23
RESE [Rest]: J1.3 Q3.2 R1_EP_DR.2
RESET [Rest]: J2.6 TP_RESET.TP U1.P$AC13
RF [Rest]: ANT1.1 C4.1 C22.1 L1.2
SCK [Rest]: J1.13 U1.P$A12
SCL [Rest]: IC1.B1 IC2.C1 IC3.12 R4.1 R17.2 TP_SCL.TP U1.P$M2 U3.7
SDA [Rest]: IC1.C1 IC2.B2 IC3.2 R2.1 R18.2 TP_SDA.TP U1.P$L1 U3.8
SWDCLK [Rest]: J2.4 TP_SWDCLK.TP U1.P$AA24
SWDIO [Rest]: J2.2 TP_SWDIO.TP U1.P$AC24
SWO [Rest]: TP_SWO.TP U1.P$AD22
VBAT [Power]: C27.2 C37.2 IC1.C2 TP_VBAT.TP U3.2 U3.3
VBUS [Power]: C21.1 C38.2 C42.1 C43.1 D3.5 IC1.A2 J4\.A4_B9 J4\.A9_B4 U1.P$AD2
VREG [Power]: C23.1 C24.2 C39.1 IC1.B2 IC9.A1 IC9.A2 IC9.A3 TP_VREG.TP

## Tracks (layer width: path | path; a pad name or v marks a point on that pad's centre or on a via)
3V3  (via drill 0.3)  (1 unrouted)
  Top 0.3: J2.1 39.15,27.5 39.78,27.5 40.04,27.75 41.05,27.75 42.01,28.7 42.01,32.7 41.82,32.89 TP_3V3.TP 41.88,32.13 38.64,32.13 37.31,33.46 36.67,33.46 TP_3.3V.TP 36.48,33.46 v29.56,33.46 | 33.24,20.89 34.39,20.89 C12.1 | 33.24,20.89 32.04,20.89 31.53,20.38 31.53,20.26 U1.P$A22 | 22.16,20.16 21.75,20.57 C14.1 21.56,20.64 v21.56,23.05 | 22.16,20.16 22.45,19.88 25.12,19.88 25.18,19.81 25.94,19.81 U1.P$B1 | v13.43,23.18 13.81,22.8 C19.1 | 33.24,20.89 33.24,22.03 32.99,22.29 32.35,22.29 v32.29,22.22 | 4.42,2.16 3.78,2.16 3.4,2.54 R18.1 | 4.42,2.16 5.11,2.16 R17.1 | 6.45,7.56 6.57,7.56 IC9.E2 | 6.45,7.56 6.26,7.56 IC9.E3 6.13,7.62 5.75,7.62 5.3,8.06 4.42,8.06 C33.1 4.35,7.94 4.22,7.81 4.22,7.49 | 4.22,7.49 4.22,6.86 C25.1 | 4.42,2.16 4.42,4 v3.91,4.51 | 4.22,7.49 v3.91,7.49 | 15.37,7.59 13.62,5.84 11.08,5.84 R7.2 | 15.37,7.59 15.62,7.84 | 15.62,7.84 17.24,9.46 17.37,9.46 IC2.C2 | 15.62,7.84 16.35,7.11 16.35,6.41 15.02,5.08 15.02,1.46 15.78,0.7 19.4,0.7 20.16,1.46 20.16,3.94 21.05,4.83 21.05,5.84 R8.2 | 6.45,7.56 6.45,8.95 7.91,10.41 9.5,10.41 9.56,10.48 12.48,10.48 12.92,10.03 | 15.37,7.59 12.92,10.03 | 26.01,15.24 26.26,15.24 26.45,15.05 U1.P$Y2 | 26.01,15.24 U1.P$W1 | 25.72,15.02 25.56,14.86 23.02,14.86 22.7,15.18 C6.1 22.64,15.05 v22.13,14.54 | 25.72,15.02 25.88,15.18 26.01,15.24 | v18.77,13.65 18.77,14.22 IC3.3 | v19.72,15.68 19.53,15.68 19.46,15.75 19.34,15.75 IC3.7 19.15,15.81 19.15,16.57 18.89,16.83 18.39,16.83 17.75,16.19 17.75,15.81 IC3.10 17.56,15.75 17.43,15.75 16.67,14.99 16.67,14.1 16.73,14.03 v16.73,13.91 | Q1.2 42.33,8.7 41.82,9.21 40.17,9.21 R_PWR_EPD.2 40.17,9.08 39.78,8.7 39.4,8.7 38.83,9.27 37.63,9.27 C8.1 37.56,9.46 37.56,9.65 37.37,9.84 v34.51,9.84
  Top 0.3: v30.13,13.02 29.5,13.65 29.5,13.72 U1.P$AD14 | U1.P$AD23 31.91,13.72 31.91,13.59 31.53,13.21 v31.53,13.02 31.53,12.89 33.56,10.86 33.56,9.08 C7.1 | v32.23,7.62 32.23,5.72 R5.2 | v26.01,14.73 25.72,15.02 | v12.86,9.97 12.92,10.03 | 22.16,20.16 21.18,19.18 v21.18,17.02
  Bottom 0.3: v13.43,23.18 13.43,27.24 16.48,30.29 16.99,30.29 19.94,27.34 | 19.94,27.34 20.73,26.54 20.73,23.88 v21.56,23.05 21.69,23.11 23.21,24.64 29.75,24.64 32.16,22.22 v32.29,22.22 | v29.56,33.46 26.9,30.8 23.4,30.8 19.94,27.34 | v3.91,7.49 v3.91,4.51 | v18.77,13.65 18.77,14.73 v19.72,15.68 19.72,15.49 20.67,14.54 21.18,14.54 | 21.18,14.54 v22.13,14.54 | 32.23,9.84 32.23,12.19 31.53,12.89 v31.53,13.02 v30.13,13.02 30.01,13.08 29.31,13.78 28.23,13.78 28.1,13.65 27.21,13.65 26.13,14.73 v26.01,14.73 | 32.23,9.84 v32.23,7.62 | 32.23,9.84 v34.51,9.84 | v12.86,9.97 16.73,13.84 v16.73,13.91 | 21.18,14.54 v21.18,17.02
ALERT  (via drill 0.3)
  Top 0.15: v33.75,17.08 33.12,17.72 32.48,17.72 U1.P$J24 | v35.91,10.35 v35.91,13.08 | v35.72,8.89 34.58,8.89 34.26,8.57 33.05,8.57 31.59,10.03 U3.5
  Bottom 0.15: v33.75,17.08 33.75,16.7 35.91,14.54 v35.91,13.08 | v35.91,10.35 35.91,9.08 v35.72,8.89
D+  (via drill 0.3)
  Top 0.15: v23.27,10.48 23.59,10.16 27.15,10.16 28.29,11.3 28.29,12.32 27.53,13.08 27.53,13.72 U1.P$AD6 | v22.51,10.99 22.51,11.94 20.67,13.78 v20.67,15.3 | v20.67,16.51 20.67,22.8 21.88,24 D3.4
  Bottom 0.15: v23.27,10.48 23.02,10.48 v22.51,10.99 | v20.67,16.51 v20.67,15.3
D-  (via drill 0.3)
  Top 0.15: v27.85,12.13 27.85,12.19 27.02,13.02 27.02,13.72 U1.P$AD4 | v40.48,11.05 39.98,11.05 v36.93,14.1 | v36.1,17.78 v36.93,16.95 | v24.48,24.13 23.91,24.13 23.85,24.07 D3.6
  Bottom 0.15: v27.85,12.13 27.4,12.13 26.58,11.3 26.58,10.92 31.28,6.22 36.67,6.22 40.48,10.03 v40.48,11.05 | v36.93,16.95 v36.93,14.1 | v36.1,17.78 29.75,24.13 v24.48,24.13
DEC1
  Top 0.15: U1.P$C1 25.94,19.3 25.18,19.3 24.99,19.49 22.89,19.49 22.64,19.24 C5.1
DEC3
  Top 0.15: U1.P$D23 31.97,19.05 32.29,19.05 32.35,19.11 33.75,19.11 33.94,18.92 34.96,18.92 35.4,19.37 C11.1
DEC4_6  (via drill 0.3)
  Top 0.15: 32.93,18.73 33.69,18.73 33.94,18.48 34.7,18.48 34.9,18.29 34.9,16.95 35.34,16.51 C10.1 | 32.93,18.73 32.48,18.73 U1.P$E24 | 28.1,23.05 28.1,23.3 27.66,23.75 C15.1 27.59,23.81 27.59,25.34 27.53,25.4 L3.2 27.47,25.46 27.02,25.91 26.13,25.91 26.01,25.78 26.01,25.02 23.4,22.41 22.83,22.41 C16.1 | 28.1,23.05 28.1,21.78 27.28,20.95 27.28,19.81 U1.P$B5 | v32.93,18.67 32.93,18.73 | v28.16,23.05 28.1,23.05
  Bottom 0.15: v32.93,18.67 32.93,20.51 30.39,23.05 v28.16,23.05
DN
  Top 0.15: 23.88,28.22 23.91,28.19 24.42,28.19 24.61,28.38 24.61,28.96 J4\.B7 | 23.88,28.22 23.72,28.38 23.72,28.96 J4\.A7 | D3.1 23.85,26.54 23.85,28.19 23.88,28.22
DP
  Top 0.15: 23.21,29.59 23.21,29.02 J4\.B6 | 23.21,29.59 23.4,29.78 23.91,29.78 24.1,29.59 24.1,29.02 J4\.A6 | D3.3 21.88,26.54 20.99,26.54 18.77,28.77 18.77,30.35 19.27,30.86 21.88,30.86 23.15,29.59 23.21,29.59
EPD_3V3  (via drill 0.3)
  Top 0.3: J1.16 10.64,15.68 10.64,16 J1.15 10.7,16.19 11.15,16.19 13.75,18.8 13.75,18.92 EPD_C5.2 13.88,19.05 14.45,19.62 15.4,19.62 15.66,19.88 15.66,24.19 L5.2 15.76,24.65 v16.63,25.52 | v16.73,29.78 16.73,34.23 C1-EP-DR.1 | v37.37,10.86 39.21,10.86 40.42,9.65 44.42,9.65 Q1.3
  Bottom 0.3: v16.73,29.78 16.63,29.67 v16.63,25.52 16.73,25.47 19.66,22.54 30.39,22.54 32.04,20.89 32.04,16.19 v37.37,10.86
EPD_BUSY  (via drill 0.3)
  Top 0.15: v25.81,8.06 28.93,11.18 28.93,13.72 U1.P$AD12 | v15.34,8.83 14.83,9.33 14.83,10.86 14.77,10.92 14.77,13.59 14.64,13.72 v14.64,15.88 | v11.59,18.92 11.15,18.92 10.96,19.11 10.7,19.11 J1.9
  Bottom 0.15: v25.81,8.06 23.4,8.06 21.75,6.41 15.66,6.41 15.34,6.73 v15.34,8.83 | v11.59,18.92 v14.64,15.88
EPD_CS  (1 unrouted)
EPD_DC  (via drill 0.3)
  Top 0.15: v28.48,13.27 28.48,13.72 U1.P$AD10 | v28.86,6.73 23.02,6.73 v20.23,9.53 | v17.62,11.18 17.62,12.38 15.78,14.22 v15.78,14.8 | v11.4,18.22 10.77,18.22 10.7,18.16 J1.11
  Bottom 0.15: v28.48,13.27 30.51,11.24 30.51,10.86 30.26,10.6 29.88,10.6 28.29,12.19 28.29,12.32 28.04,12.57 27.4,12.57 26.26,11.43 26.26,9.33 v28.86,6.73 | v20.23,9.53 19.27,9.53 v17.62,11.18 | v15.78,14.8 14.83,14.8 v11.4,18.22
EPD_RST  (1 unrouted)
GDR
  Top 0.15: Q3.1 9.18,31.18 9.18,30.03 R2_EP_DR.2 9.18,29.97 9.18,23.75 10.26,22.67 10.64,22.67 J1.2
GND  (via drill 0.3)
  Top 0.15: C30.1 14.96,5.65 13.3,4 SW_UP.1 13.43,4.19 12.73,4.89 9.5,4.89 8.23,3.62 7.34,3.62 | 7.27,3.62 6.64,3.62 5.94,2.92 C24.1 5.94,2.98 4.61,4.32 4.61,6.29 | IC9.B1 7.02,6.41 7.02,6.73 IC9.C1 6.96,6.79 6.64,6.79 IC9.C2 6.57,6.79 6.26,6.79 IC9.C3 6.19,6.73 5.05,6.73 4.61,6.29 | 4.61,6.29 3.78,6.29 3.21,6.86 C25.2 3.15,6.86 3.15,8 4.35,9.21 C33.2 4.48,9.21 6.13,9.21 7.72,10.79 7.97,10.79 J1.MP2 8.04,10.86 8.04,13.97 9.43,15.37 10.07,15.37 | v17.88,8.44 17.88,8.95 IC2.B3 | v16.67,9.65 15.46,9.65 EPD_C12.1 15.4,9.72 15.4,11.37 EPD_C11.1 15.34,11.37 15.34,12.7 EPD_C10.1 15.27,12.76 15.27,14.03 EPD_C9.1 15.21,14.1 15.21,15.24 EPD_C8.1 15.21,15.3 15.21,16.45 EPD_C7.1 15.15,16.45 15.15,17.21 | C5.2 22.07,19.18 22.07,17.91 22,17.84 C17.1 21.94,17.78 21.62,17.46 21.62,16.57 C18.1 21.56,16.51 21.31,16.51 20.86,16.06 20.16,16.06 19.02,17.21 18.64,17.21 | 14.96,18.22 14.96,17.84 15.08,17.72 EPD_C6.1 15.15,17.65 15.15,17.21 | 14.96,18.22 14.96,18.92 EPD_C5.1 | 15.15,17.21 18.64,17.21 | 10.07,15.37 10.26,15.18 10.64,15.18 J1.17 10.7,15.18 11.02,15.18 11.21,15.37 11.21,15.75 13.69,18.22 14.96,18.22 | 10.07,15.37 10.07,19.37 10.29,19.59 | 10.29,19.59 10.32,19.62 J1.8 | 8.54,25.34 8.54,24.45 8.04,23.94 J1.MP1 8.04,23.88 8.04,21.84 10.29,19.59 | 8.54,25.34 8.54,29.97 R2_EP_DR.1 | 8.54,25.34 5.49,25.34 5.3,25.53 5.3,27.05 2.89,29.46 2.89,30.1 D4.1 | 40.8,19.11 40.8,18.35 C1.2 | 40.8,19.11 40.8,19.56 C2.2 | 41.69,19.18 41.56,19.18 41.5,19.11 40.8,19.11 | 41.69,19.18 43.98,19.18 44.48,18.67 44.74,18.67 C21.2 44.48,18.6 44.17,18.29 44.17,18.22 43.47,17.53 39.98,17.53 39.59,17.14 39.59,16.76 38.93,16.1
  Top 0.15: 34.2,15.94 34.2,16.38 34.26,16.45 C10.2 34.32,16.51 34.32,17.91 C13.2 | 34.2,15.94 34.2,14.92 C3.2 | 38.93,16.1 37.75,17.27 X1.4 | 38.93,16.1 39.09,15.94 39.09,14.6 C4.2 39.15,14.48 39.91,13.72 43.28,13.72 44.29,12.7 44.48,12.7 C22.2 44.55,12.64 44.55,10.67 45.12,10.1 45.12,9.08 43.25,7.21 | X1.2 38.9,18.73 38.9,18.48 37.82,17.4 X1.4 | 34.2,15.94 36.61,15.94 37.82,17.14 X1.4 | C6.2 21.56,15.18 21.56,13.84 C20.2 21.62,13.78 21.62,13.27 22.96,11.94 22.96,11.75 23.27,11.43 IC1.D2 23.27,11.37 23.27,11.11 | 23.27,11.11 22.7,10.54 22.64,10.54 | 22.64,10.54 21.62,10.54 21.24,10.92 21.24,11.05 R3.1 21.12,11.05 20.99,11.18 20.48,11.18 20.29,10.99 | 22.64,10.54 22.64,10.48 22.96,10.16 22.96,8.76 C37.1 23.02,8.76 24.48,8.76 25.62,7.62 29.62,7.62 30.01,8 U3.1 30.07,8.13 30.07,8.38 30.77,9.08 U3.9 | 20.29,10.99 20.29,10.86 C32.1 | 19.62,11.72 20.29,11.05 20.29,10.99 | 19.62,11.72 19.46,11.87 C34.1 | 23.27,11.11 23.91,10.48 27.02,10.48 27.47,10.92 27.47,11.3 27.4,11.37 27.4,12.13 C38.1 | 19.62,11.72 17.94,10.03 IC2.B1 | 35.66,5.27 35.66,4.25 35.4,4 SW_DN.1 35.66,4.19 37.94,1.91 37.94,1.59 TP_GND.TP 38.01,1.91 38.83,2.73 41.88,2.73 TP_BAT_GND.TP | 35.66,5.27 35.66,5.91 C29.1 | 24.99,4.57 24.99,6.22 24.8,6.41 24.42,6.41 24.29,6.29 24.29,6.1 C31.1 | 24.99,4.57 24.42,4 SW_ENT.1 | 24.99,4.57 25.75,4.57 26.9,3.43 27.09,3.43 C39.2 27.21,3.37 28.67,3.37 31.47,6.16 31.47,6.29 C27.1 31.47,8 U3.4 | U3.6 31.02,10.03 31.02,9.4 30.77,9.14 U3.9 | U3.4 31.53,8.13 31.53,8.38 30.83,9.08 U3.9 | 34.07,9.33 34.07,10.16 34.58,10.67 34.58,11.75 C9.2 | 34.07,9.33 34.07,9.08 C7.2 | 34.07,9.33 37.05,9.33 C8.2 37.05,9.27 37.05,8.06
  Top 0.15: 37.05,8.06 37.05,7.49 37.82,6.73 38.13,6.73 C43.2 38.2,6.73 38.71,6.73 39.53,7.56 39.53,7.68 C42.2 39.59,7.75 42.71,7.75 43.25,7.21 | 37.05,8.06 31.59,8.06 U3.4 | 35.66,5.27 42.71,5.27 43.47,6.03 43.47,6.98 43.25,7.21 | 27.47,18.86 27.72,19.11 U1.P$B7 27.72,19.81 27.72,20.07 27.66,20.13 27.66,20.89 31.72,24.96 31.72,26.1 | 31.66,18.54 31.28,18.54 U1.P$78 | 31.66,18.54 31.91,18.54 U1.P$F23 | 31.66,18.54 31.66,19.18 31.91,19.43 C11.2 | U1.P$74 27.4,16.38 27.4,15.24 U1.P$87 27.47,15.24 28.61,15.24 U1.P$88 | U1.P$83 27.4,16.45 U1.P$74 | U1.P$84 28.61,16.45 28.61,16.76 U1.P$74 | U1.P$79 27.47,17.65 28.04,18.22 U1.P$74 | U1.P$80 28.61,17.65 U1.P$74 | U1.P$76 28.1,18.29 U1.P$74 | U1.P$89 29.88,15.24 30.96,15.24 U1.P$74 | U1.P$85 29.82,16.45 U1.P$74 | U1.P$90 31.02,15.24 U1.P$74 | U1.P$86 30.96,16.38 30.45,15.88 U1.P$74 | U1.P$81 29.82,17.65 U1.P$74 | U1.P$77 29.88,18.8 30.45,18.22 U1.P$74 | U1.P$82 30.96,17.65 30.45,18.16 U1.P$74 | U1.P$78 | U1.P$78 U1.P$74 | 22.32,21.97 22.32,21.08 22.77,20.64 C14.2 22.83,20.57 23.27,20.57 v23.46,20.38 | 22.32,21.97 22.32,22.35 C16.2 | 22.32,21.97 23.4,21.97 25.18,23.75 26.51,23.75 C15.2 | IC3.9 18.26,15.81 18.7,15.81 IC3.8 | R9.1 18.32,14.92 18.45,15.05 18.51,15.05 18.64,15.18 18.64,15.75 IC3.8 | v18.64,16.32 18.64,15.88 IC3.8 | 27.47,18.86 U1.P$74 | 27.47,18.86 U1.P$75 | EPD_C1.1 14.96,20.26 14.96,21.4 EPD_C2.1 14.89,21.46 14.51,21.84 14.51,22.73 C19.2 14.45,22.86 14.45,22.99 13.81,23.62 12.92,23.62 12.8,23.75 12.8,26.1 | R_TYPE_SEL.1 15.78,32.83 14.77,32.83 13.75,31.81 13.56,31.81 SJ1.1 13.5,31.75 12.8,31.05 12.8,26.1 | 34.45,26.1 34.45,25.46 34.9,25.02 34.9,20.95 C12.2 34.96,20.95 40.61,20.95 41.69,19.88 41.69,19.18
  Top 0.15: 34.45,26.1 35.34,26.99 36.1,26.99 36.55,27.43 J2.5 36.61,27.5 37.82,27.5 J2.3 | J4\.SH3 28.23,29.53 27.72,29.02 27.15,29.02 J4\.A1_B12 27.09,28.96 27.09,28.07 26.58,27.56 26.2,27.56 26.13,27.62 25.12,27.62 R1_USB.1 25.05,27.56 25.05,26.54 24.16,25.65 23.46,25.65 22.89,26.22 22.89,26.48 D3.2 | J4\.SH3 28.23,29.59 28.23,33.66 J4\.SH1 | D3.2 22.83,26.54 22.83,26.86 22.07,27.62 R2_USB.2 22,27.62 21.69,27.62 21.62,27.56 21.24,27.56 20.73,28.07 20.73,28.96 J4\.A12_B1 20.67,29.02 20.1,29.02 19.59,29.53 J4\.SH4 | C1-EP-DR.2 17.94,34.23 19.02,34.23 19.53,33.72 J4\.SH2 | 31.72,26.1 34.45,26.1 | 31.72,26.1 28.29,29.53 J4\.SH3 | 18.64,26.1 21.12,26.1 21.56,25.65 22.26,25.65 22.83,26.22 D3.2 | 18.64,26.1 12.8,26.1 | 18.64,26.1 18.64,17.21
  Bottom 0.15: v16.67,9.65 v17.88,8.44 | v18.64,16.32 19.85,16.32 22.13,18.6 23.46,18.6 | 23.46,18.6 25.24,18.6 25.81,19.18 27.09,19.18 27.4,18.86 U1.P$75 | 23.46,18.6 v23.46,20.38 | J4\.SH2 19.59,33.66 19.59,29.59 J4\.SH4
  pour Bottom: 48.92,38.84 48.93,38.87 48.93,38.93 48.92,38.96 48.9,38.98 48.87,39 48.85,39 48.85,39 48.84,39 48.82,39 48.82,38.99 48.82,38.99 48.81,38.99 48.8,38.98 48.79,38.98 48.79,38.98 48.78,38.97 48.77,38.96 48.77,38.96 48.77,38.96 48.77,38.95 48.76,38.93 48.76,38.93 48.75,38.91 48.75,38.9 48.75,38.89 48.75,38.89 48.75,38.88 48.75,38.87 48.75,38.86 48.75,38.86 48.76,38.85 48.76,38.84 48.76,38.84 48.76,38.83 48.77,38.82 48.78,38.82 48.79,38.81 48.79,38.81 48.8,38.81 48.81,38.8 48.81,38.8 48.82,38.8 48.83,38.8 48.87,38.8 48.9,38.82
  pour Top: -0.68,10.87 -0.7,-0.91 46.23,-0.91 46.37,19.1 46.34,31.74 40.81,36.7 -0.6,36.62 -0.6,24.08 5.79,24.1 5.79,24.1 5.8,24.1 5.82,24.1 5.82,24.1 5.82,24.1 5.83,24.09 5.85,24.09 5.85,24.09 5.85,24.09 5.86,24.08 5.87,24.07 5.87,24.07 5.87,24.07 5.87,24.05 5.88,24.04 5.88,24.04 5.88,24.04 5.88,24.02 5.88,24.01 5.88,24.01 5.82,10.94 5.82,10.93 5.82,10.93 5.82,10.93 5.82,10.91 5.81,10.9 5.81,10.9 5.81,10.9 5.8,10.89 5.79,10.88 5.79,10.88 5.79,10.88 5.77,10.87 5.76,10.87 5.76,10.87 5.76,10.87 5.75,10.87
  pour Bottom: -1.13,11.17 -1.21,-1.34 46.54,-1.33 46.88,31.82 40.78,37.14 -0.96,36.87 -0.98,23.75 5.56,23.81 5.56,23.81 5.58,23.81 5.59,23.81 5.59,23.81 5.59,23.81 5.61,23.81 5.62,23.8 5.62,23.8 5.62,23.8 5.63,23.79 5.64,23.78 5.64,23.78 5.64,23.78 5.65,23.76 5.66,23.75 5.66,23.75 5.66,23.75 5.66,23.74 5.66,23.72 5.66,23.72 5.64,11.29 5.64,11.27 5.64,11.27 5.64,11.27 5.63,11.26 5.63,11.24 5.62,11.24 5.62,11.24 5.61,11.23 5.6,11.22 5.6,11.22 5.6,11.22 5.59,11.22 5.58,11.21 5.58,11.21 5.58,11.21 5.56,11.21
HAPTIC_EN  (via drill 0.3)
  Top 0.15: v24.8,16.57 25.31,16.57 25.62,16.26 25.62,16.13 25.94,15.81 U1.P$U1 | v24.8,13.02 24.8,12.19 v24.86,12.13 | v19.02,10.48 18.89,10.48 18.45,10.03 IC2.A1
  Bottom 0.15: v24.8,13.02 v24.8,16.57 | v24.86,12.13 23.91,12.13 23.21,11.43 19.97,11.43 v19.02,10.48
IMU_INT1
  Top 0.15: U1.P$N1 25.94,16.76 25.56,16.76 25.37,16.95 25.05,16.95 24.99,17.02 23.66,17.02 22.39,15.75 20.42,15.75 19.46,14.8 19.27,14.8 IC3.5
IMU_INT2  (1 unrouted)
LX1  (via drill 0.3)
  Top 0.15: IC9.B2 6.57,6.35 6.26,6.35 IC9.B3 6.19,6.35 6.07,6.35 5.81,6.1 5.81,5.78 6.13,5.46 v8.8,5.46 | v10.51,6.73 11.97,6.73 L7.1
  Bottom 0.15: v8.8,5.46 9.24,5.46 v10.51,6.73
LX2  (via drill 0.3)
  Top 0.15: IC9.D2 6.57,7.18 6.26,7.18 IC9.D3 6.19,7.18 v5.43,7.18 | v6.96,8.7 8.29,8.7 9.69,10.1 10.7,10.1 11.97,8.83 L7.2
  Bottom 0.15: v6.96,8.7 v5.43,7.18
MOSI  (1 unrouted)
N$1
  Top 0.15: IC9.D1 7.08,7.11 9.11,7.11 R4.2
N$2
  Top 0.15: R1_USB.2 25.12,28.19 25.12,28.96 J4\.A5
N$3
  Top 0.15: U1.P$AC5 27.21,14.22 26.64,14.22 26.58,14.16 23.02,14.16 22.7,13.84 C20.1
N$4
  Top 0.15: IC9.E1 7.08,7.62 8.42,7.62 9.5,8.7 R2.2
N$5
  Top 0.15: EPD_C2.2 13.81,21.46 11.15,21.46 11.02,21.59 10.7,21.59 J1.4
N$6
  Top 0.15: U1.P$B3 26.77,19.81 26.77,21.34 27.59,22.16 L2.1
N$7  (1 unrouted)
N$8
  Top 0.15: R3.2 21.69,11.11 21.56,11.24 21.56,11.3 20.54,12.32 18.83,12.32 17.75,13.4 17.75,14.22 IC3.1
N$9
  Top 0.15: EPD_C1.2 13.81,20.26 11.84,20.26 11.02,21.08 10.7,21.08 J1.5
N$10
  Top 0.15: R2_USB.1 22.07,28.19 22.07,28.89 22.13,28.96 J4\.B5
N$12
  Top 0.15: C31.2 24.61,5.84 24.48,5.72 22.7,5.72 22.58,5.84 21.69,5.84 R8.1
N$13
  Top 0.15: C2-EP-DR.1 7.02,33.4 7.02,30.8 6.38,30.16 D4.2 6.32,30.1 6.32,28.26 D2.1
N$14  (via drill 0.3)
  Top 0.15: v15.85,6.86 15.02,6.03 C30.2 | v30.96,4.95 32.16,4.95 32.74,5.52 32.74,5.65 R5.1
  Bottom 0.15: v15.85,6.86 21.75,6.86 23.4,8.51 26.64,8.51 28.42,6.73 28.42,6.54 30.01,4.95 v30.96,4.95
N$15
  Top 0.15: D5.2 6.07,26.03 6.07,27.18 5.49,27.75 5.49,32.96 5.94,33.4 C2-EP-DR.2 6,33.46 6.19,33.46 6.7,33.97 9.24,33.97 9.88,33.34 Q3.3 9.94,33.34 11.84,33.34 12.61,34.1 15.72,34.1 16.23,33.59 16.23,29.46 15.72,28.96 L5.1
N$16
  Top 0.15: EPD_C6.2 14,17.65 11.02,14.67 10.7,14.67 J1.18
N$17
  Top 0.15: C32.2 20.61,10.79 20.61,10.6 19.53,9.53 18.45,9.53 IC2.A2
N$18
  Top 0.15: EPD_C7.2 14.07,16.45 13.24,16.45 10.96,14.16 10.7,14.16 J1.19
N$19
  Top 0.15: EPD_C8.2 14,15.24 12.54,15.24 10.96,13.65 10.7,13.65 J1.20
N$20
  Top 0.15: L3.1 26.51,25.4 26.51,24.7 27.09,24.13 27.09,22.67 26.64,22.22 L2.2
N$21
  Top 0.15: EPD_C10.2 14.2,12.7 10.77,12.7 10.7,12.64 J1.22
N$23
  Top 0.15: EPD_C12.2 14.26,9.65 13.81,9.65 11.84,11.62 10.7,11.62 J1.24
N$24  (via drill 0.3)
  Top 0.15: v32.74,21.78 32.04,21.78 30.51,20.26 U1.P$A18 | v35.78,18.73 35.78,18.29 35.47,17.97 C13.1
  Bottom 0.15: v35.78,18.73 v32.74,21.78
N$25
  Top 0.15: R1_EP_DR.1 11.08,30.1 11.08,31.05 13.3,33.27 13.5,33.27 SJ1.2 13.56,33.34 13.62,33.4 15.78,33.4 R_TYPE_SEL.2
N$26  (via drill 0.3)
  Top 0.15: v33.31,16.7 32.48,16.7 U1.P$N24 | v35.15,13.91 34.58,13.33 34.58,12.38 34.13,11.94 34.13,11.81 C9.1
  Bottom 0.15: v33.31,16.7 35.15,14.86 v35.15,13.91
N$27  (via drill 0.3)
  Top 0.15: v32.55,18.22 32.48,18.22 32.29,18.03 31.97,18.03 U1.P$H23 | C3.1 35.28,14.86 v34.7,14.29 34.7,14.22 34.13,13.65 34.13,13.02 L1.1
  Bottom 0.15: v32.55,18.22 32.55,16.19 34.45,14.29 v34.7,14.29
N$28  (via drill 0.3)
  Top 0.15: 37.82,20.38 40.67,20.38 41.25,19.81 41.25,19.62 C2.1 | 37.82,20.38 33.94,20.38 33.82,20.26 U1.P$A23 | v37.82,19.62 37.82,18.8 X1.3 | v37.82,20.51 37.82,20.38
  Bottom 0.15: v37.82,20.51 v37.82,19.62
N$29
  Top 0.15: 39.59,17.97 39.59,19.37 38.9,20.07 34.07,20.07 33.82,19.81 32.48,19.81 U1.P$B24 | 39.59,17.97 X1.1 | C1.1 41.31,18.29 41.31,18.1 41.05,17.84 39.78,17.84 39.66,17.97 39.59,17.97
OUT+
  Top 0.15: IC2.A3 18.45,8.95 18.45,2.41 18.83,2.03 TP_OP.TP
OUT-
  Top 0.15: IC2.C3 17.37,8.95 17.37,3.05 16.35,2.03 TP_ON.TP
P0.00/XL1  (via drill 0.3)
  Top 0.15: v26.32,20.19 26.39,20.13 26.39,19.62 26.45,19.56 26.45,19.05 U1.P$D2 | v24.8,19.05 24.8,18.48 24.54,18.22 X2.1 24.48,18.1 24.23,17.84 22.51,17.84 C17.2
  Bottom 0.15: v26.32,20.19 25.94,20.19 v24.8,19.05
P0.01/XL2  (via drill 0.3)
  Top 0.15: v26.01,18.73 26.2,18.54 26.45,18.54 U1.P$F2 | v24.16,16.57 24.16,16 24.48,15.68 X2.2 | v22.7,17.14 22.13,16.57 C18.2
  Bottom 0.15: v26.01,18.73 26.01,18.41 24.45,16.86 | v24.16,16.57 24.45,16.86 | v22.7,17.14 22.7,17.34 23.15,17.78 23.53,17.78 24.45,16.86
P0.13  (1 unrouted)
P0.14  (via drill 0.3)
  Top 0.15: v27.72,14.16 27.78,14.22 28.16,14.22 U1.P$AC9 | v25.56,11.87 v25.56,13.14 | v21.69,7.43 21.69,6.86 v22.26,6.29 | v22.39,5.4 22.39,5.14 21.62,4.38 21.62,4 SW_ENT.2
  Bottom 0.15: v27.72,14.16 27.21,14.16 26.2,15.18 25.81,15.18 25.56,14.92 v25.56,13.14 | v25.56,11.87 25.56,11.3 v21.69,7.43 | v22.26,6.29 22.26,5.52 v22.39,5.4
P1.01  (via drill 0.3)
  Top 0.15: v32.61,13.65 31.97,14.29 31.97,14.99 U1.P$Y23 | R_PWR_EPD.1 39.53,9.27 v38.77,10.03 38.71,10.03 38.52,10.22 37.37,10.22 36.93,10.67 36.93,11.05 37.18,11.3 39.28,11.3 39.98,10.6 42.33,10.6 Q1.1
  Bottom 0.15: v32.61,13.65 33.94,13.65 37.56,10.03 v38.77,10.03
P1.02  (via drill 0.3)
  Top 0.15: 32.86,15.24 32.48,15.24 U1.P$W24 | 32.86,15.24 33.63,14.48 33.63,11.37 v34.13,10.86 | 35.28,5.97 v35.28,7.11 | 35.28,5.97 C29.2 | v10.51,9.65 10.51,8.95 10.07,8.51 10.07,6.54 10.51,6.1 10.51,5.84 R7.1 | v9.88,14.92 v9.88,13.91 | v21.24,24.13 v19.27,22.16 | v33.31,16.06 33.31,15.75 32.86,15.3 32.86,15.24 | 35.28,5.97 34.26,5.97 32.61,4.32 32.61,4 SW_DN.2
  Bottom 0.15: v34.13,10.86 35.28,9.72 v35.28,7.11 | v10.51,9.65 10.51,13.27 v9.88,13.91 | v9.88,14.92 9.88,17.84 14.2,22.16 v19.27,22.16 | v21.24,24.13 22.2,24.13 23.08,25.02 30.13,25.02 36.55,18.6 36.55,17.59 36.29,17.34 34.13,17.34 33.94,17.53 33.5,17.53 32.86,16.89 32.86,16.51 v33.31,16.06
PMIC_INT  (1 unrouted)
PREVGH  (via drill 0.3)
  Top 0.15: EPD_C9.2 14.13,14.03 11.84,14.03 10.96,13.14 10.7,13.14 J1.21 10.57,13.14 10,13.14 v8.92,14.22 | v7.84,24.45 7.53,24.76 5.62,24.76 4.42,25.97 2.64,25.97 D5.1
  Bottom 0.15: v7.84,24.45 7.84,15.3 v8.92,14.22
PREVGL  (via drill 0.3)
  Top 0.15: EPD_C11.2 14.2,11.37 12.54,11.37 11.78,12.13 10.7,12.13 J1.23 10.57,12.13 10.32,12.13 8.67,13.78 v8.48,13.78 | v4.86,26.16 2.83,28.19 D2.2
  Bottom 0.15: v4.86,26.16 5.75,26.16 7.4,24.51 7.4,14.86 v8.48,13.78
RESE
  Top 0.15: Q3.2 10.51,31.18 10.51,30.1 R1_EP_DR.2 10.45,30.03 11.21,29.27 11.21,22.41 10.96,22.16 10.7,22.16 J1.3
RESET  (via drill 0.3)  (1 unrouted)
  Top 0.15: v37.31,26.92 36.61,26.22 J2.6 | v40.36,32.64 39.98,32.64 39.21,33.4 TP_RESET.TP
  Bottom 0.15: v37.31,26.92 37.31,27.3 38.83,28.83 38.83,31.11 v40.36,32.64
RF  (via drill 0.3)  (1 unrouted)
  Top 0.15: L1.2 35.15,13.02 36.67,14.54 38.58,14.54 C4.1 38.64,14.48 v38.64,13.72 | v39.78,12.7 43.4,12.7 C22.1
  Bottom 0.15: v39.78,12.7 39.66,12.7 v38.64,13.72
SCK  (via drill 0.3)
  Top 0.15: v28.35,20.83 28.93,20.26 U1.P$A12 | v12.48,18.67 10.96,17.14 10.7,17.14 J1.13
  Bottom 0.15: v28.35,20.83 14.64,20.83 v12.48,18.67
SCL  (via drill 0.3)  (1 unrouted)
  Top 0.15: v23.46,12.76 24.1,12.13 24.1,11.87 IC1.B1 | IC3.12 17.62,14.8 v17.18,14.35 17.18,13.53 18.07,12.64 18.07,10.99 17.43,10.35 17.43,10.03 IC2.C1 | R17.2 5.18,1.52 7.91,1.52 8.1,1.33 TP_SCL.TP 7.91,1.59 8.35,2.03 v8.35,2.73 | v9.24,6.48 9.69,6.92 9.69,7.05 R4.1 | v26.45,8.06 29.88,11.49 30.26,11.49 30.51,11.24 30.51,10.1 U3.7
  Bottom 0.15: v23.46,12.76 23.02,13.21 18.32,13.21 v17.18,14.35 9.69,14.35 7.4,12.06 7.4,7.3 3.46,3.37 3.46,2.98 3.72,2.73 v8.35,2.73 8.35,3.56 | v9.24,6.48 8.67,5.91 8.61,5.91 8.35,5.65 8.35,3.56 | v26.45,8.06 26.45,4.38 25.62,3.56 8.35,3.56
SDA  (via drill 0.3)  (1 unrouted)
  Top 0.15: TP_SDA.TP 1.49,8.06 1.49,7.49 3.34,5.65 3.34,3.17 R18.2 3.4,3.17 v3.91,3.17 | v22.83,12.76 23.66,11.94 23.66,11.87 IC1.C1 | v19.02,12.76 18.26,13.53 18.26,14.22 IC3.2 | v23.34,17.34 25.12,17.34 25.18,17.27 25.94,17.27 U1.P$L1 | v10.07,9.14 9.24,9.14 9.11,9.02 9.11,8.95 8.92,8.76 R2.1 | v30.07,11.05 30.07,10.1 U3.8
  Bottom 0.15: v23.34,17.34 23.34,13.53 23.91,12.95 23.91,12.57 | 23.91,12.57 23.66,12.32 23.21,12.32 22.83,12.7 v22.83,12.76 v19.02,12.76 18.58,12.76 14.96,9.14 v10.07,9.14 10,9.14 4.03,3.17 v3.91,3.17 | v30.07,11.05 28.23,12.89 25.94,12.89 25.62,12.57 23.91,12.57
SWDCLK  (via drill 0.3)
  Top 0.15: v32.93,14.54 32.74,14.73 32.48,14.73 U1.P$AA24 | v38.45,26.67 38.33,26.67 37.88,26.22 J2.4 | v41.37,26.1 44.42,29.15 TP_SWDCLK.TP
  Bottom 0.15: v32.93,14.54 32.48,14.1 32.42,14.1 32.16,13.84 32.16,13.46 32.42,13.21 33.94,13.21 37.56,9.59 38.96,9.59 39.53,10.16 39.53,11.87 39.91,12.25 39.98,12.25 40.23,12.51 40.23,13.46 39.72,13.97 39.72,17.27 40.67,18.22 42.01,18.22 42.26,18.48 42.26,20.26 38.83,23.69 38.83,25.4 38.96,25.53 38.96,25.97 | 38.96,25.97 38.96,26.16 v38.45,26.67 | v41.37,26.1 40.8,26.1 40.67,25.97 38.96,25.97
SWDIO  (via drill 0.3)
  Top 0.15: v32.42,12.76 33.05,13.4 33.05,13.84 32.8,14.1 32.74,14.1 32.61,14.22 32.48,14.22 U1.P$AC24 | v30.9,21.27 30.9,21.46 v34.32,24.89 | v38.52,25.72 38.64,25.72 39.09,26.16 J2.2 39.15,26.16 39.34,25.97 40.86,25.97 42.13,24.7 44.48,24.7 TP_SWDIO.TP
  Bottom 0.15: v32.42,12.76 31.66,13.53 31.66,20.51 v30.9,21.27 | v34.32,24.89 35.66,24.89 36.55,25.78 38.45,25.78 v38.52,25.72
SWO  (via drill 0.3)
  Top 0.15: v33.05,9.33 31.09,11.3 31.09,13.33 31.47,13.72 U1.P$AD22 | v34.83,7.56 36.36,7.56 37.75,6.16 41.88,6.16 42.2,6.48 TP_SWO.TP
  Bottom 0.15: v34.83,7.56 v33.05,9.33
VBAT  (via drill 0.3)
  Top 0.3: 31.02,8.06 31.02,7.24 | 31.02,7.24 31.02,6.35 | 31.02,6.35 C27.2 | 31.02,8.06 U3.3 | 31.02,8.06 30.58,8.06 U3.2 | v24.1,10.92 24.04,10.92 23.72,11.24 23.72,11.37 IC1.C2 | v22.51,9.27 22.51,8.76 C37.2 22.51,8.64 22.51,8.51 23.78,7.24 31.02,7.24 | v36.1,4.7 43.85,4.7 TP_VBAT.TP | v30.64,6.03 30.9,6.29 31.02,6.35
  Bottom 0.3: v24.1,10.92 24.1,10.54 22.83,9.27 v22.51,9.27 | v36.1,4.7 31.97,4.7 v30.64,6.03
VBUS  (via drill 0.3)
  Top 0.3: C42.1 39.15,7.75 38.2,7.75 C43.1 38.07,7.68 v37.5,7.68 | 26.48,11.65 26.96,12.13 C38.2 26.9,12.25 26.51,12.64 26.51,13.72 U1.P$AD2 | 26.48,11.65 26.2,11.37 24.54,11.37 IC1.A2 | 26.48,11.65 v27.02,11.11 | v41.82,18.67 43.59,18.67 C21.1 | v26.39,28 26.39,28.89 26.32,28.96 J4\.A4_B9 | v21.43,28 21.5,28.07 21.5,28.96 J4\.A9_B4 | v22.89,25.53 22.89,24.07 D3.5 | v39.98,11.68 39.28,12.38 v39.28,13.72
  Bottom 0.3: v27.02,11.11 31.53,6.6 35.53,6.6 36.61,7.68 v37.5,7.68 37.63,7.75 39.98,10.1 v39.98,11.68 | 39.28,18.67 36.99,18.67 27.66,28 v26.39,28 22.89,28 | 39.28,18.67 v41.82,18.67 | 22.89,28 v21.43,28 | 22.89,28 v22.89,25.53 | 39.28,18.67 v39.28,13.72
VREG  (via drill 0.3)  (3 unrouted)
  Top 0.3: IC9.A3 6.26,5.97 6.57,5.97 IC9.A2 6.77,5.97 IC9.A1 | IC9.A1 | 7.27,4.06 5.94,4.06 C24.2 | IC9.A1 9.05,5.97 9.3,5.72 9.3,5.27 | 9.3,5.27 9.3,5.21 8.16,4.06 7.46,4.06 | TP_VREG.TP 28.8,1.91 27.53,1.91 26.07,3.37 C39.1 25.94,3.49 v25.43,4 | v13.94,5.27 9.3,5.27
  Bottom 0.3: v13.94,5.27 21.75,5.27 23.02,4 v25.43,4